# EAGLE board pixy_ESP_daughter_board_v5 (EAGLE 9.7.0)
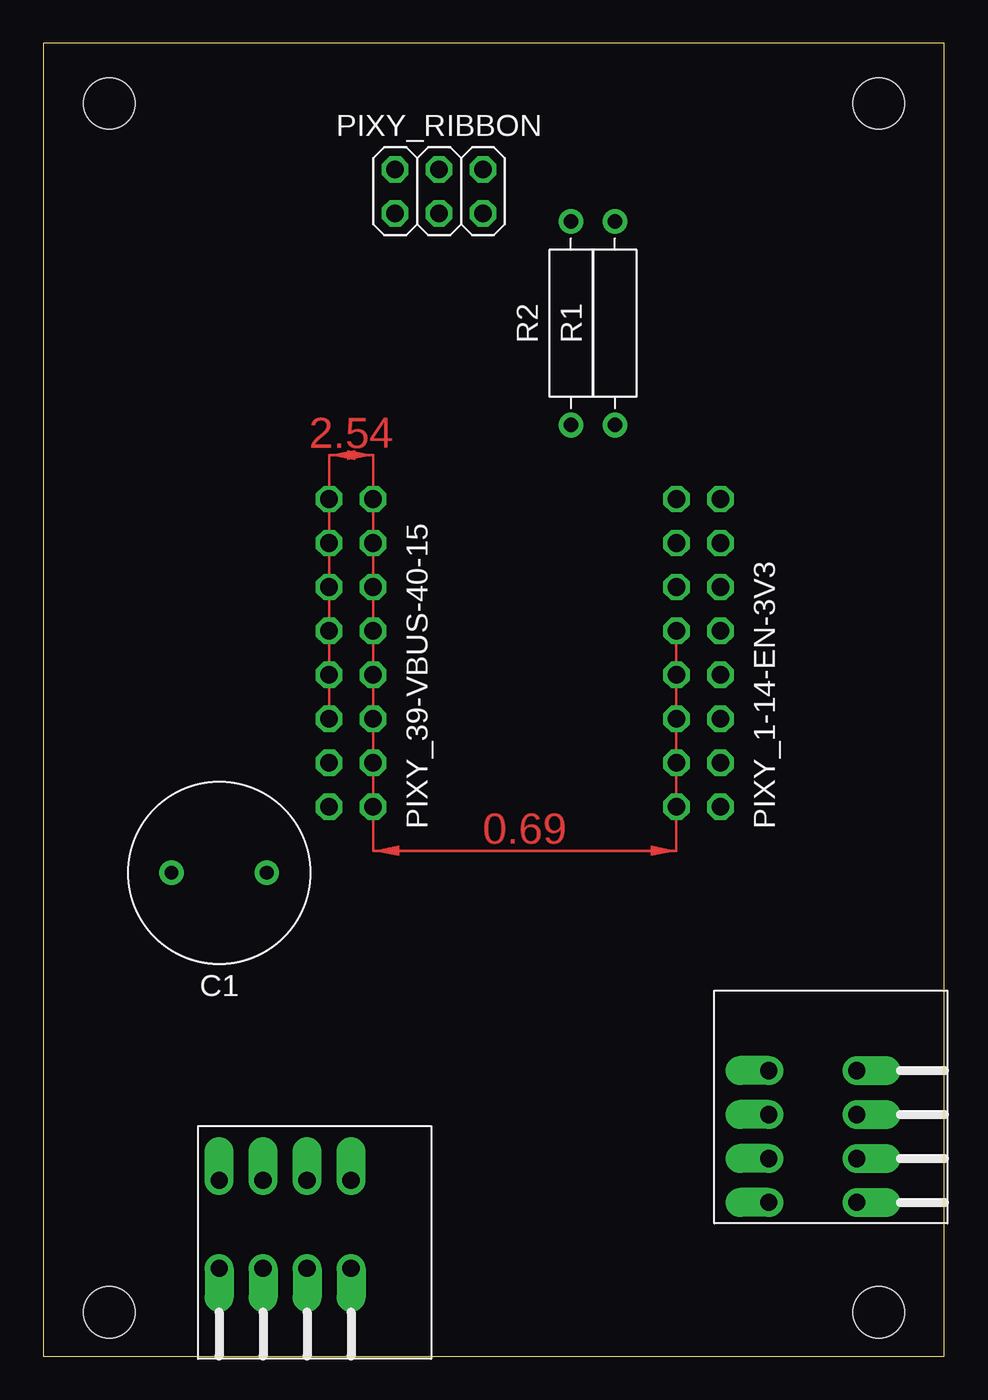
[diagram p0: board, top side]
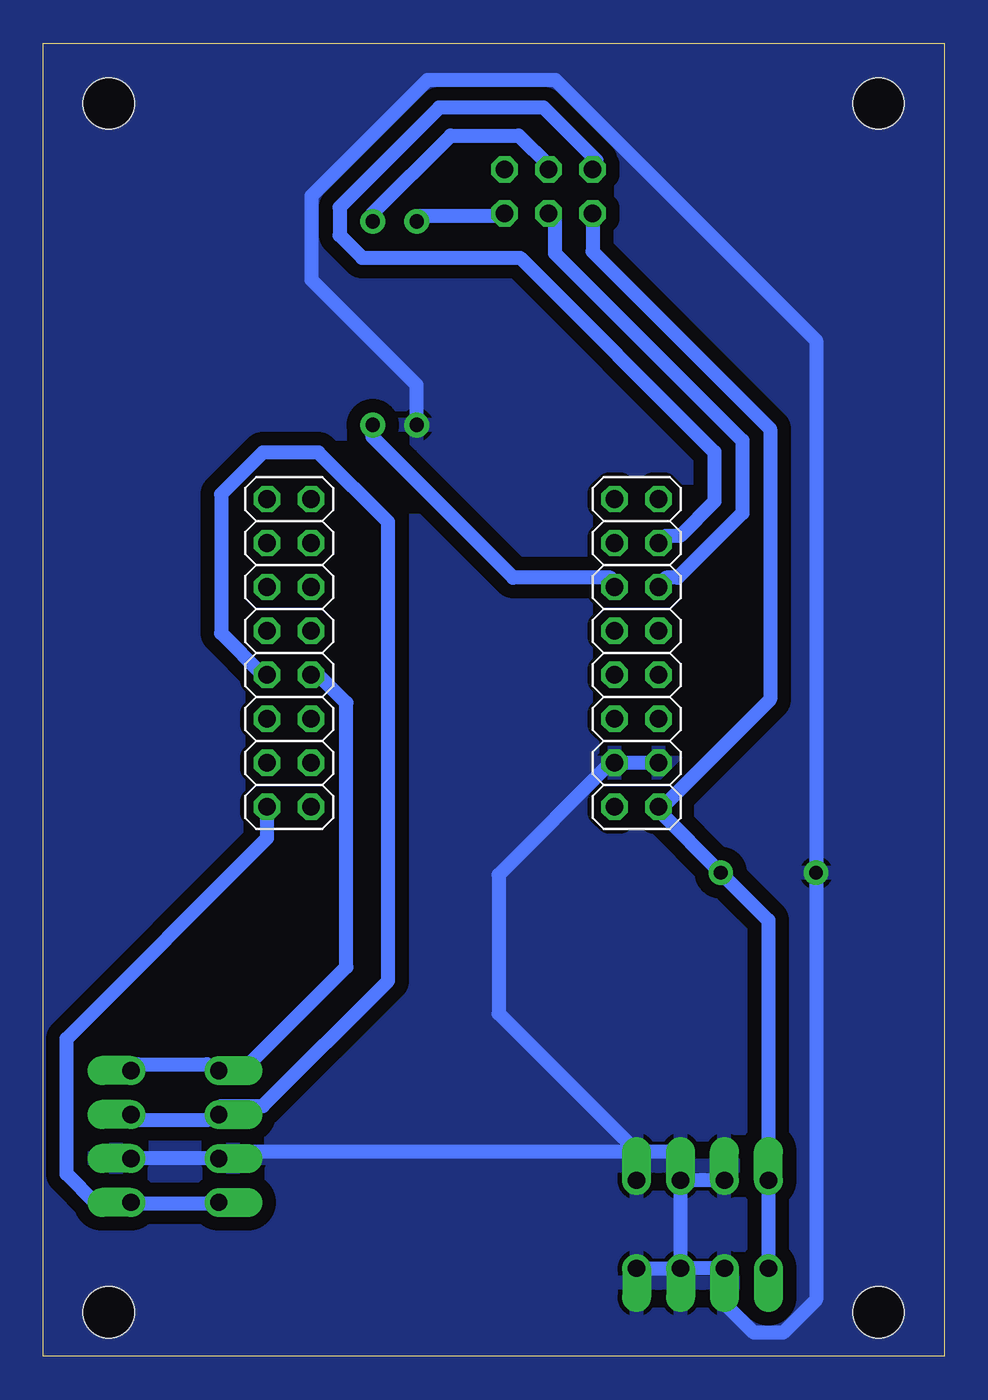
[diagram p1: board, bottom side, seen from below]

Size 52.05 x 75.87 mm. Coordinates in mm from the lower left corner, seen from the top.
Outline: 0,0 52.05,0 52.05,75.87 0,75.87 0,0
Copper layers (1*16): Top 0.035mm / dielectric 1.5mm / Bottom 0.035mm
Design rules "OthermillDRC_1_32_v2 *": minimum track width 32mil, minimum drill 0.8mm, track to track 0.794003125mm, track to pad 0.794003125mm, pad to pad 1mil, via to via 1mil, smd to smd 0mil, copper to edge 0mil, drill to drill 1mil, minimum pad ring 10mil, minimum via ring 10mil, stop-mask expansion 1mil, vias tented up to drill 30mil, thermal gap 10mil
Holes 2.95 mm at 3.81,2.54 48.26,2.54 48.26,72.39 3.81,72.39

## Footprints (pad centres in the part's own frame; a part is rotated, then mirrored left to right if it is on the bottom)
CAPRD550W60D1025H1250B = drill 0.8 pad 1.4: 1 -2.75,0; 2 2.75,0
2X08 = drill 1.016 octagon: 1 -8.89,-1.27; 2 -8.89,1.27; 3 -6.35,-1.27; 4 -6.35,1.27; 5 -3.81,-1.27; 6 -3.81,1.27; 7 -1.27,-1.27; 8 -1.27,1.27; 9 1.27,-1.27; 10 1.27,1.27; 11 3.81,-1.27; 12 3.81,1.27; 13 6.35,-1.27; 14 6.35,1.27; 15 8.89,-1.27; 16 8.89,1.27
2X03 = drill 1.016 octagon: 1 -2.54,-1.27; 2 -2.54,1.27; 3 0,-1.27; 4 0,1.27; 5 2.54,-1.27; 6 2.54,1.27
1-2834016-4 = drill 1 pad 1.676 offset: P$1 0,0; P$2 -5.08,0; P$3 0,-2.54; P$4 -5.08,-2.54; P$5 0,-5.08; P$6 -5.08,-5.08; P$7 0,-7.62; P$8 -5.08,-7.62
RESAD1176W63L850D250B = drill 0.83 pad 1.43: 1 -5.88,0; 2 5.88,0

## Placement (x,y rotation side)
C1  10u  [CAPRD550W60D1025H1250B]  10.16,27.94 180 top
PIXY_1-14-EN-3V3  PINHD-2X8  [2X08]  37.85,40.64 90 bottom
PIXY_39-VBUS-40-15  PINHD-2X8  [2X08]  17.78,40.64 90 bottom
PIXY_RIBBON  PINHD-2X3  [2X03]  22.86,67.31 0 top
POWER_IN  TE_CONN_1-2834016-4  [1-2834016-4]  10.16,10.16 90 top
R1  0  [RESAD1176W63L850D250B]  33.02,59.69 90 top
R2  0  [RESAD1176W63L850D250B]  30.48,59.69 90 top
VL53L0X1  TE_CONN_1-2834016-4  [1-2834016-4]  41.91,8.89 180 top

## Library data of the parts
C1 = Capacitor; CATEGORY: Capacitor
PIXY_1-14-EN-3V3 PIXY_39-VBUS-40-15 = Connector; CATEGORY: Headers; DESCRIPTION: Header, Straight, 2x8 Position; MANUFACTURER: Generic; MPN: Generic; OPERATING_TEMPERATURE: Generic; PART_STATUS: Active; PITCH: 0.100" (2.54mm); ROHS_COMPLIANCE: Generic; SERIES: Generic; SUB-CATEGORY: Headers, Male Pins; TYPE: Board to Board or Cable, Unshrouded, Through Hole, Straight
PIXY_RIBBON = Connector; CATEGORY: Headers; DESCRIPTION: Header, Straight, 2x3 Position; MANUFACTURER: Generic; MPN: Generic; OPERATING_TEMPERATURE: Generic; PART_STATUS: Active; PITCH: 0.100" (2.54mm); ROHS_COMPLIANCE: Generic; SERIES: Generic; SUB-CATEGORY: Headers, Male Pins; TYPE: Board to Board or Cable, Unshrouded, Through Hole, Straight
POWER_IN = 1-2834016-4; N: POWER_IN
R1 R2 = Resistor; CATEGORY: Resistor; SUB-CATEGORY: Fixed
VL53L0X1 = 1-2834016-4; N: VL53L0X

## Nets
3V3: PIXY_1-14-EN-3V3.2 VL53L0X1.P$1 VL53L0X1.P$2
35: PIXY_39-VBUS-40-15.11 PIXY_RIBBON.3
36: PIXY_39-VBUS-40-15.12 R1.1
36_PIXY: PIXY_RIBBON.4 R1.2
37: PIXY_39-VBUS-40-15.13 PIXY_RIBBON.2
GND: C1.2 PIXY_39-VBUS-40-15.3 PIXY_39-VBUS-40-15.4 POWER_IN.P$3 POWER_IN.P$4 POWER_IN.P$5 POWER_IN.P$6 POWER_IN.P$7 POWER_IN.P$8 R2.1 VL53L0X1.P$3 VL53L0X1.P$4
GND_PIXY: PIXY_RIBBON.5 R2.2
SCL: PIXY_1-14-EN-3V3.8 VL53L0X1.P$5 VL53L0X1.P$6
SDA: PIXY_1-14-EN-3V3.7 VL53L0X1.P$7 VL53L0X1.P$8
VDD: C1.1 PIXY_39-VBUS-40-15.1 PIXY_RIBBON.1 POWER_IN.P$1 POWER_IN.P$2

## Tracks (layer width: path | path; a pad name or v marks a point on that pad's centre or on a via)
3V3
  Bottom 0.813: PIXY_1-14-EN-3V3.2 39.12,29.93 50.7,18.35 50.7,10.54 49.01,8.84 47.4,8.84 VL53L0X1.P$2 46.6,8.84 42.58,8.84 VL53L0X1.P$1
35
  Bottom 0.813: PIXY_39-VBUS-40-15.11 16.07,44.99 15.4,44.99 11.67,48.72 11.67,52.91 22.5,63.74 22.5,65.67 PIXY_RIBBON.3
36
  Bottom 0.813: R1.1 33.04,53.13 24.91,44.99 19.28,44.99 PIXY_39-VBUS-40-15.12
36_PIXY
  Bottom 0.813: PIXY_RIBBON.4 22.86,68.81 24.59,70.54 28.52,70.54 33.02,66.04 33.02,65.74 R1.2
37
  Bottom 0.813: PIXY_39-VBUS-40-15.13 16.07,47.4 15.27,47.4 13.28,49.39 13.28,52.25 24.5,63.47 33.63,63.47 34.94,64.78 34.94,66.4 29.18,72.15 23.14,72.15 20.09,69.09 PIXY_RIBBON.2
GND
  Bottom 0.813: PIXY_39-VBUS-40-15.3 PIXY_39-VBUS-40-15.4 19.29,34.29 25.75,27.82 25.75,19.81 17.78,11.84 | 17.78,11.84 39.83,11.84 40.23,11.43 VL53L0X1.P$3 VL53L0X1.P$4 | 17.78,11.84 POWER_IN.P$7 | POWER_IN.P$3 POWER_IN.P$5 | POWER_IN.P$8 POWER_IN.P$6 | POWER_IN.P$7 17.78,11.84 | 17.78,11.84 15.24,11.84 POWER_IN.P$5 | POWER_IN.P$6 POWER_IN.P$4 12.7,3.4 12.7,3.06 11,1.36 9.32,1.36 7.41,3.27 C1.2 7.41,58.69 22.48,73.76 29.85,73.76 36.54,67.06 36.54,62.19 30.48,56.13 R2.1 | POWER_IN.P$6 POWER_IN.P$5 | 17.78,11.84 POWER_IN.P$7
  pour Bottom: -2.13,-3.4 54.2,-3.4 54.2,78.33 -2.13,78.33
GND_PIXY
  Bottom 0.813: R2.2 30.53,65.88 25.71,65.88 PIXY_RIBBON.5
SCL
  Bottom 0.813: PIXY_1-14-EN-3V3.8 39.37,39.37 41.78,41.78 41.78,49.81 39.37,52.22 36.15,52.22 32.14,48.2 32.14,21.69 39.37,14.46 41.78,14.46 VL53L0X1.P$5 42.58,13.66 46.6,13.66 VL53L0X1.P$6
SDA
  Bottom 0.813: PIXY_1-14-EN-3V3.7 36.15,39.37 34.55,37.76 34.55,22.5 40.17,16.87 41.78,16.87 VL53L0X1.P$7 42.58,16.87 46.6,16.87 VL53L0X1.P$8
VDD
  Bottom 0.813: POWER_IN.P$2 POWER_IN.P$1 10.16,11.84 10.16,25.19 C1.1 16.51,31.54 PIXY_39-VBUS-40-15.1 16.27,31.75 10.06,37.96 10.06,53.58 20.32,63.83 PIXY_RIBBON.1
(copper drawn outside any net)
  shapes: Top area x2